# Altium PCB PCB_USB.PcbDoc
Units mm, origin at the board's own origin, x right, y up, seen from the top; angles counter-clockwise.
Board outline 8.38 x 12.32 mm, 2 copper layers (Top Layer, Bottom Layer); 3 components, 16 nets, 10 pads, 0 vias.
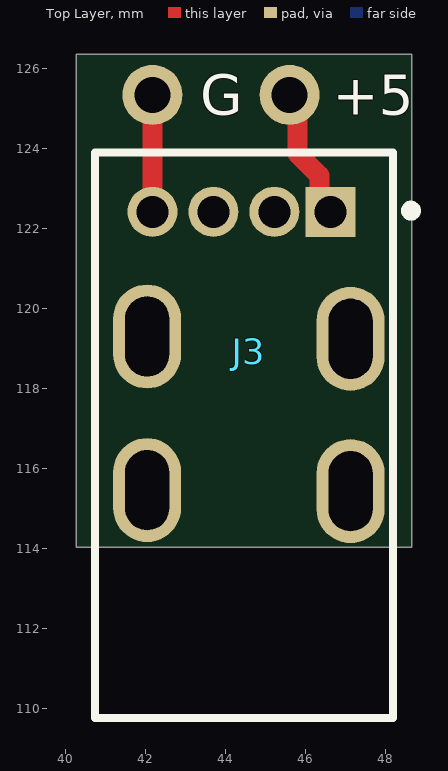
[diagram p0: Top Layer view]
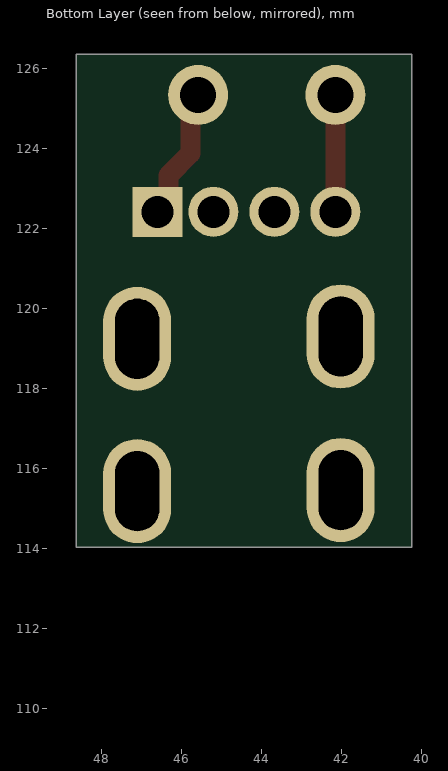
[diagram p1: Bottom Layer view, seen from below]

## Layer stack, top to bottom
Top Solder: solder mask 0.0102, Solder Resist, Dk 3.5
Top Layer: signal copper 0.0356
Dielectric 1: dielectric 0.32, FR-4, Dk 4.8
Bottom Layer: signal copper 0.0356
Bottom Solder: solder mask 0.0102, Solder Resist, Dk 3.5

## Board outline
48.641,114.046 40.259,114.046 40.259,126.365 48.641,126.365

## Design rules (kind name [scope] priority, off if disabled: settings)
Clearance [All] p1: gap=0.254 ignorepadtopadclearanceinfootprint=FALSE except(0: Arc-Hole Track-Hole SMDPad-Hole THPad-Hole Via-Hole Fill-Hole Poly-Hole Region-Hole Text-Hole)
PolygonConnect [All] p1: connectstyle=Relief reliefconductorwidth=0.254 reliefentries=4 polygonreliefangle="90 Angle" airgapwidth=0.254
RoutingVias [All] p1: holewidth=0.711 width=1.27 viastyle="Through Hole" minholewidth=0.711 minwidth=1.27 maxholewidth=0.711 maxwidth=1.27
SolderMaskExpansion [All] p1: expansion=0.102 istentingtop=FALSE
Width gnd_and_+5 [(InNet('+5') OR InNet('GND'))] p1: maxlimit=0.5 minlimit=0.254 preferedwidth=0.5
Width [All] p2: maxlimit=0.254 minlimit=0.254 preferedwidth=0.254
30 further rules are at their usual default settings.

## Classes and differential pairs
component class SCH_main: SPDT1

## Components (designator, comment, footprint, x,y, rotation, side; value= is the part's Value field where it differs from the comment)
+5 "Battery Pad" "BATTERY PAD" 45.593,125.349 r90 top (schematic designator bp13)
G "Battery Pad" "BATTERY PAD" 42.164,125.349 r90 top (schematic designator bp14)
J3 "USB 2.0 A female" USBA2F_MOLEX_67329-8000_0 44.45,116.84 r0 top

## Footprints (in the part's own frame and the unit in brackets; to place one, negate y for a bottom-side part, rotate by r counter-clockwise, add the part's x,y. Pads: shape width x height; smd on the part's side, far side on the other; paste and mask are expansions set on the pad)
"BATTERY PAD" [mm]
  round 1.5 hole 0.9 unplated: 1(0,0)
USBA2F_MOLEX_67329-8000_0 [mm]
  rect 1.25x1.25 hole 0.8 paste-1000 mask+0: 1(2.159,5.588)
  round 1.25 hole 0.8 paste-1000 mask+0: 2(0.762,5.588) 3(-0.762,5.588) 4(-2.286,5.588)
  oval 1.7x2.6 hole 2 slot 1.1 at 0 deg paste-1000 mask+0: 5(-2.42,2.47) 6(2.667,2.413) 7(-2.42,-1.37) 8(2.667,-1.397)
  silkscreen extent -3.72,-7.06 4.3,7.06, body extent -3.37,-6.96 3.63,6.72, height 14.47

## Part data
J3: library part 67329-8000

## Nets (pads, with @x,y where several pads share a name; then routed paths per layer and width w, separated by ;. In a path a pad name is that pad's centre, name@x,y a point inside that pad or via, vN(x,y) a via of type N, cw(c..) or ccw(c..) an arc to the next point about the centre after c; other vN are vias at no path point)
+5: +5.1 J3.1 | length 3.3
  Top Layer w0.5: +5.1 45.784,125.158 45.784,123.887 46.341,123.33 46.341,122.696 J3.1
+sch: 
-sch: 
a: 
b: 
B+: 
c: 
d: 
e: 
f: 
g: 
GND: G.1 J3.4 | length 2.9
  Top Layer w0.5: J3.4 G.1
ina: 
inb: 
NetIC2_20: 
VCC: 
pads on no net: J3.2 J3.3 J3.5 J3.6 J3.7 J3.8